# Altium PCB tinyprobe_power_fix.PcbDoc
Units mm, origin at the board's own origin, x right, y up, seen from the top; angles counter-clockwise.
Board outline 9.12 x 5.01 mm, 4 copper layers (Top Layer, Signal Layer 1, Signal Layer 2, Bottom Layer), stack 0.778 mm thick; 11 components, 6 nets, 27 pads, 12 vias.
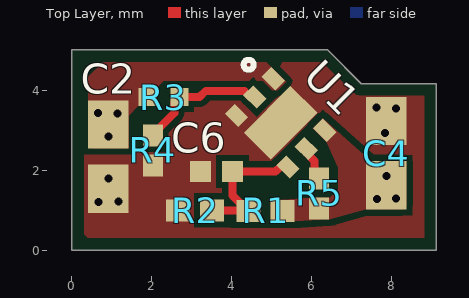
[diagram p0: Top Layer view]
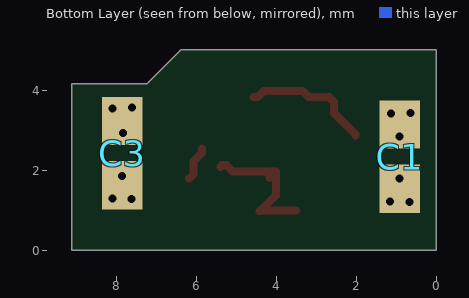
[diagram p1: Bottom Layer view, seen from below]
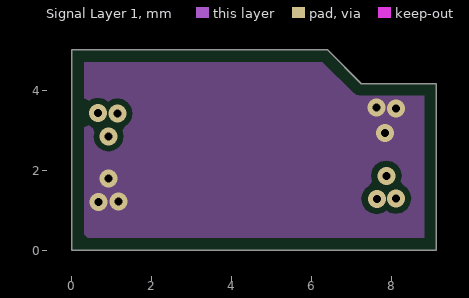
[diagram p2: Signal Layer 1]
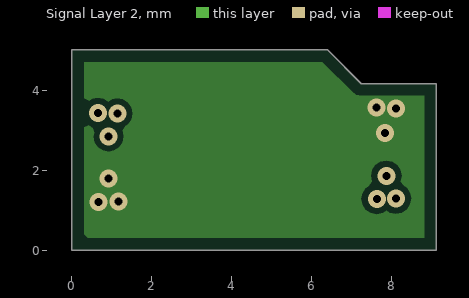
[diagram p3: Signal Layer 2]

## Layer stack, top to bottom
Top Solder: solder mask 0.0102, Solder Resist, Dk 3.5
Top Layer: signal copper 0.0356
Dielectric 1: core 0.254, FR-4, Dk 4.2
Signal Layer 1: signal copper 0.036
Dielectric 3: dielectric 0.127, Dk 4.2
Signal Layer 2: signal copper 0.036
Dielectric 2: core 0.254, FR-4, Dk 4.2
Bottom Layer: signal copper 0.0356
Bottom Solder: solder mask 0.0102, Solder Resist, Dk 3.5

## Board outline
9.117,4.161 7.235,4.161 6.39,5.009 0,5.009 0,0 8.881,0 8.882,0.001 9.117,0.001

## Design rules (kind name [scope] priority, off if disabled: settings)
BoardOutlineClearance [Not OnSilkscreen] p1: gap=0 ignorepadtopadclearanceinfootprint=FALSE except(0.3: Track-OutlineEdge Poly-OutlineEdge)
Clearance Clearance_50_Ohm [InNetClass('50 Ohm')] p1: gap=0.15 ignorepadtopadclearanceinfootprint=FALSE except(0: Arc-Hole Track-Hole SMDPad-Hole THPad-Hole Via-Hole Fill-Hole Poly-Hole Region-Hole Text-Hole; 0.7: Arc-Fill Arc-Poly Arc-Region Track-Fill Track-Poly Track-Region)
Clearance [All] p2: gap=0.15 ignorepadtopadclearanceinfootprint=FALSE except(0: Arc-Hole Track-Hole SMDPad-Hole THPad-Hole Via-Hole Fill-Hole Poly-Hole Region-Hole Text-Hole)
HoleSize [All] p1: absolutevalues=TRUE maxlimit=5 minlimit=0.2 maxpercent=80.000 minpercent=20.000
MinimumSolderMaskSliver [All] p1: minsoldermaskwidth=0.1
PlaneConnect [All] p1: pad.planeconnectstyle=Relief pad.reliefexpansion=0.508 pad.reliefentries=4 pad.reliefconductorwidth=0.254 pad.reliefairgap=0.254 via.planeconnectstyle=Direct via.reliefexpansion=0.508 via.reliefentries=4 via.reliefconductorwidth=0.254 via.reliefairgap=0.254
PolygonConnect [All] p1: connectstyle=Direct reliefconductorwidth=0.254 reliefentries=4 polygonreliefangle="90 Angle" airgapwidth=0.254
RoutingVias [All] p1: holewidth=0.2 width=0.45 viastyle="Through Hole" minholewidth=0.2 minwidth=0.45 maxholewidth=0.2 maxwidth=0.45
SilkToSilkClearance [All] p1: silktosilkclearance=0.01
SilkToSolderMaskClearance [IsPad] p1: minsilkscreentomaskgap=0.01 clearancetoexposedcopper=TRUE
SolderMaskExpansion SolderMaskExpansion_1 [IsVia] p1: expansion=0.102 istentingtop=TRUE
SolderMaskExpansion [All] p2: expansion=0.05 istentingtop=FALSE
Width Width_50_Ohm [InNetClass('50 Ohm')] p1: maxlimit=0.35 minlimit=0.15 preferedwidth=0.35 toplayer_minwidth=0.25 midlayer1_maxwidth=0.15 midlayer1_prefwidth=0.15 midlayer2_maxwidth=0.15 midlayer2_prefwidth=0.15 bottomlayer_minwidth=0.25 minimp=50.000000 maximp=50.000000 favimp=50.000000
Width [All] p2: maxlimit=2.5 minlimit=0.15 preferedwidth=0.45 toplayer_minwidth=0.2 bottomlayer_minwidth=0.24 minimp=50.000000 maximp=50.000000 favimp=50.000000
25 further rules are at their usual default settings.

## Components (designator, comment, footprint, x,y, rotation, side; value= is the part's Value field where it differs from the comment)
C1 "10uF" FP-GRM188-0_1-e0_2_0_55-IPC_A 0.915,2.34 r270 bottom locked
C2 "10uF" FP-GRM188-0_1-e0_2_0_55-IPC_A 0.915,2.34 r270 top locked
C3 "10uF" FP-GRM188-0_1-e0_2_0_55-IPC_A 7.857,2.425 r90 bottom locked
C4 "10uF" FP-GRM188-0_1-e0_2_0_55-IPC_A 7.857,2.425 r90 top locked
C6 "100 nF" FP-C0402-BB-MFG 3.617,1.965 r180 top locked value="0.10 μF"
R1 "1.5 MOhm" RESC1005X40X25NL05T10 4.847,0.985 r0 top locked
R2 "1.5 MOhm" RESC1005X40X25NL05T10 3.084,0.993 r0 top locked
R3 "12k" RESC1005X40X25LL05T05 2.288,3.828 r0 top locked
R4 "27k" RESC1005X40X25LL10T10 2.028,2.496 r90 top locked
R5 "27k" RESC1005X40X25LL10T10 6.181,1.417 r90 top
U1 "NCP189CMTW120TAG" NCP189 5.22,3.183 r315 top locked

## Footprints (in the part's own frame and the unit in brackets; to place one, negate y for a bottom-side part, rotate by r counter-clockwise, add the part's x,y. Pads: shape width x height; smd on the part's side, far side on the other; paste and mask are expansions set on the pad)
FP-C0402-BB-MFG [mm]
  rect 0.52x0.52 smd paste+0 mask+0: 1(-0.4,0) 2(0.4,0)
  body extent -0.8,-0.4 0.8,0.4, height 0.25
FP-GRM188-0_1-e0_2_0_55-IPC_A [mm]
  rect 1.208x1.012 smd paste+0 mask+0: 1(-0.802,0) 2(0.802,0)
  body extent -0.8,-0.4 0.8,0.4, height 0.9
NCP189 [mm]
  rect 0.48x0.35 smd: 1(-0.91,0.65) 2(-0.91,0) 3(-0.91,-0.65) 4(0.91,-0.65) 5(0.91,0) 6(0.91,0.65)
  rect 0.95x1.65 smd: 7(0,0)
  silkscreen extent -1.72,0.34 -1.47,0.59, body extent -1,-1 1,1, height 1
RESC1005X40X25LL05T05 [mm] "Chip Resistor, 2-Leads, Body 1.05x0.55mm, IPC High Density"
  rect 0.45x0.45 smd: 1(-0.4,0) 2(0.4,0)
  body extent -0.53,-0.28 0.53,0.28, height 0.4
RESC1005X40X25LL10T10 [mm] "Chip Resistor, 2-Leads, Body 1.00x0.50mm, IPC High Density"
  rect 0.55x0.5 smd: 1(-0.375,0) 2(0.375,0)
  body extent -0.55,-0.3 0.55,0.3, height 0.4
RESC1005X40X25NL05T10 [mm] "Chip Resistor, 2-Leads, Body 1.00x0.50mm, IPC Medium Density"
  rect 0.6x0.55 smd: 1(-0.425,0) 2(0.425,0)
  body extent -0.53,-0.27 0.53,0.28, height 0.4

## Part data
C1 C2 C3 C4: library part CMP-2006-02792-2, "Chip Multilayer Ceramic Capacitors for General Purpose, 0603, 10uF, X5R, 15%, 20%, 6.3V", Case Code (Imperial)=0603, Case Code (Metric)=1608, Dielectric=X5R, Max Operating Temperature=85°C, Min Operating Temperature=-55°C, Package Quantity=4000, Tolerance=20%, Voltage=6.3V, Capacitance=10uF, Case/Package=0603, Depth=0.8mm, Height=0.8mm, Lead Free="Lead Free", Length=1.6mm, Material=Ceramic, Mount="Surface Mount", Packaging="Tape and Reel", Radiation Hardening=No, REACH SVHC="No SVHC", Termination=SMD/SMT, Thickness=0.035inch, Voltage Rating=6.3V, Voltage Rating (DC)=6.3V, Width=0.031inch
C6: library part CMP-2008-02046-2, "CAP CER 0.1UF 10V X5R 0402 / C0402C104K8PACTU", Capacitance="0.10 μF", Manufacturer=Kemet, Manufacturer Part Number=C0402C104K8PACTU, Package=C0402-BB, Temperature="-55°C to +125°C", Temperature Characteristic=X5R, Temperature Coefficient=15%, Temperature Range High=+125°C, Temperature Range Low=-55°C, Tolerance=0.1, Voltage Rating="10 V", Automotive=No, Category=Cap, ComponentLink2Description=Datasheet, ComponentLink2URL=https://content.kemet.com/datasheets/KEM_C1002_X7R_SMD.pdf, Device Class L1="Passive Components", Device Class L2=Capacitors, Device Class L3="Ceramic Capacitors", Digikey Description="CAP CER 0.1UF 10V X5R 0402", Height=0.55mm, Ipc Land Pattern Name=CAPC10050X50, Lead Free=Yes, Material=Ceramic, Mouser Description="Capacitor 100 nF 10 VDC 0402", Octopart=https://octopart.com/c0402c104k8pactu-kemet-140039, RoHS=TRUE
R1 R2: library part CMP-2002-07106-1, "RC0402FR-071M5L", Manufacturer="Yageo / Phycomp", Part Number=RC0402FR-071M5L
R3: library part CMP-2002-00646-4, "ERJ-2RKF1202X", Case Code (Imperial)=0402, Case Code (Metric)=1005, Max Operating Temperature="155 degC", Min Operating Temperature="-55 degC", Package Quantity=10000, Power Rating="100 mW", Resistance="12 KOhm", Tolerance=1%, Voltage Rating="50 V", Case\/Package=0402, ComponentLink1Description="Manufacturer URL", ComponentLink1URL=http://www.panasonic.com/, ComponentLink2Description=Datasheet, ComponentLink2URL=http://industrial.panasonic.com/cdbs/www-data/pdf/RDA0000/AOA0000C86.pdf, DatasheetVersion=04/2015, Height="0.35 mm", Length="1 mm", Mount="Surface Mount", Mounting Technology="Surface Mount", PackageDescription="2-Pin Surface Mount Device, Body 1 x 0.5 mm", PackageReference=0402, Packaging="Tape and Reel", PartNumber=ERJ-2RKF1202X, Pins=2, REACH SVHC=Yes, RoHSCompliant=true, Width="0.5 mm"
R4 R5: library part CMP-2002-05797-1, "ERA-2AEB273X", Manufacturer=Panasonic, Part Number=ERA-2AEB273X
U1: "LDO Regulator, 0.5 A, High / Accuracy (0.7%), Adjustable, / Low Noise, High PSRR with / Power Good"

## Via types
v1: diameter 0.45, hole 0.2, Top Layer to Bottom Layer, tented both sides, 12 vias

## Nets (pads, with @x,y where several pads share a name; then routed paths per layer and width w, separated by ;. In a path a pad name is that pad's centre, name@x,y a point inside that pad or via, vN(x,y) a via of type N, cw(c..) or ccw(c..) an arc to the next point about the centre after c; other vN are vias at no path point)
"1.8V AVDD": C1.1 C2.1 R3.1 U1.1
  other v1: 0.92,2.845 0.655,3.433 1.141,3.419
1V8: C3.1 C4.1 R1.2 R5.1 U1.6
  other v1: 7.624,1.282 8.099,1.292 7.863,1.858
ENABLE: C6.1 R1.1 R2.2 U1.4 | length 3.7
  Top Layer w0.2: R2.2 3.513,0.989 R1.1@4.393,0.989 ; C6.1@4.102,1.88 C6.1@4.177,1.805 ; C6.1@4.177,1.88 C6.1@4.092,1.965 ; R1.1 4.397,0.985 R1.1@4.393,0.989 ; U1.4 5.359,2.125 5.253,2.125 5.093,1.965 C6.1@4.092,1.965 ; C6.1@4.092,1.965 C6.1 4.017,1.365 R1.1@4.393,0.989
GND: C1.2 C2.2 C3.2 C4.2 C6.2 R2.1 R4.1 U1.3 U1.7
  other v1: 0.67,1.199 1.167,1.214 0.92,1.795 7.835,2.928 8.099,3.541 7.614,3.565
NetR3_2: R3.2 R4.2 U1.2 | length 3.2
  Top Layer w0.2: R4.2 2.028,2.896 2.563,3.431 2.563,3.703 R3.2 3.195,3.828 3.351,3.984 4.313,3.984 4.47,3.826 U1.2
NetR5_2: R5.2 U1.5 | length 0.9
  Top Layer w0.2: U1.5 5.863,2.433 6.068,2.229 6.068,1.905 R5.2

## Polygon pours and split planes (outlines as drawn)
GND on Top Layer "GND_L01_P003" (solid, pour order 3): 9.117,5.264 0.001,5.264 0,5.263 0,0 8.881,0 8.882,0.001 9.117,0.001
"1.8V AVDD" on Top Layer "1.8V_AVDD_L01_P002" (solid, pour order 2): 0.411,2.54 0.416,2.545 0.416,4.33 1.349,5.263 4.301,5.263 5.358,4.207 5.08,3.929 4.774,4.235 2.295,4.235 2.107,4.047 2.107,3.609 1.665,3.605 1.42,3.36 1.42,2.551
1V8 on Top Layer "1V8_L01_P001" (solid, pour order 1): 6.448,0.771 7.357,1.021 8.356,1.019 8.356,2.22 7.484,2.22 6.274,3.304 6.019,3.049 6.373,2.694 6.665,2.062 6.665,1.528 6.449,1.31 5.939,1.31 5.279,1.259 4.973,1.259 4.973,0.717 5.572,0.717
GND on Signal Layer 1 "GND_L02_P004" (solid, pour order 4): 9.117,5.264 0.001,5.264 0,5.263 0,0 8.881,0 8.882,0.001 9.117,0.001
GND on Signal Layer 2 "GND_L03_P005" (solid, pour order 5): 9.117,5.264 0.001,5.264 0,5.263 0,0 8.881,0 8.882,0.001 9.117,0.001